# Altium PCB STM32_MICROCONTROLLER.PcbDoc
Units mm, origin at the board's own origin, x right, y up, seen from the top; angles counter-clockwise.
Board outline 34 x 34 mm, 4 copper layers (L1 (SIGNAL), L2 (GND), L3 (GND), L4 (SIGNAL)), stack 1.57 mm thick; 35 components, 26 nets, 172 pads, 47 vias.
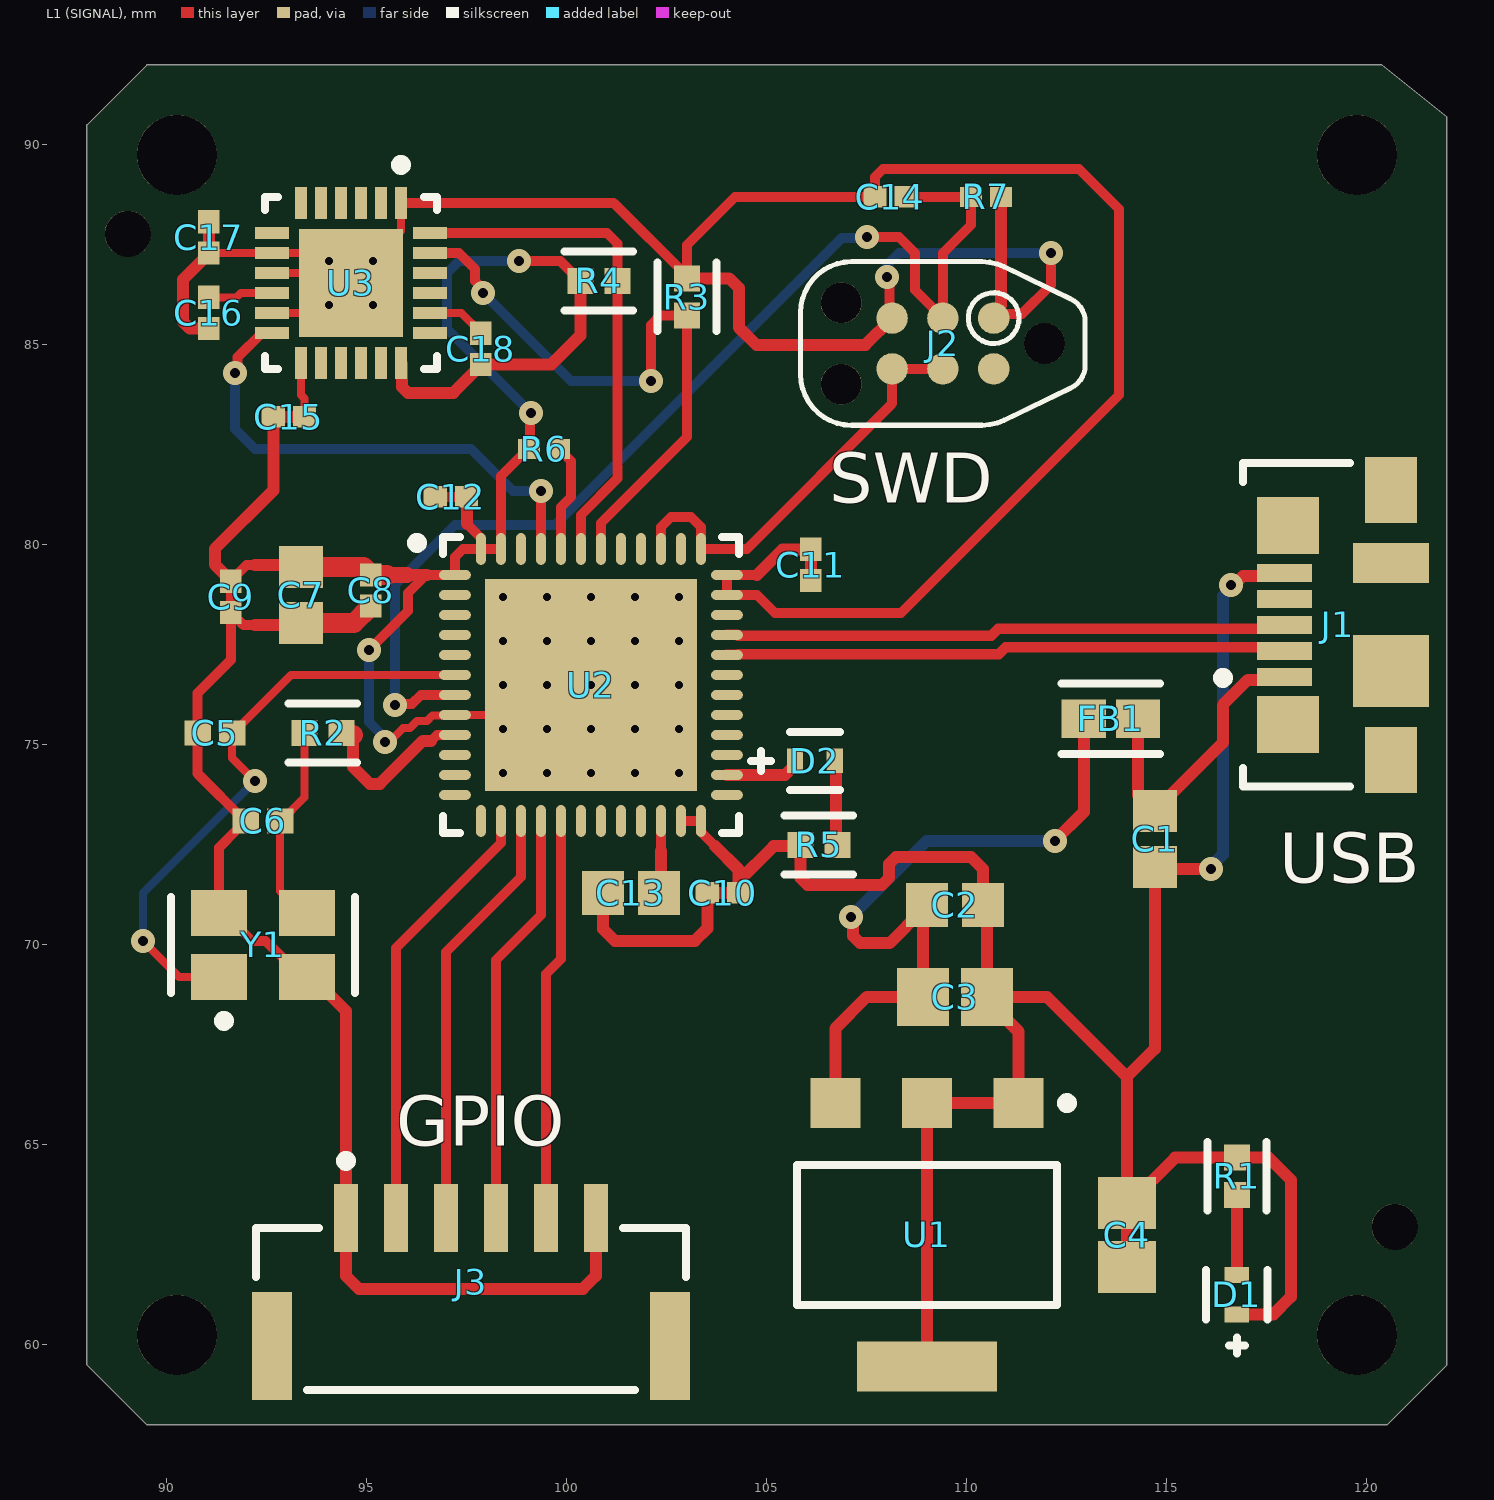
[diagram p0: L1 (SIGNAL) view]
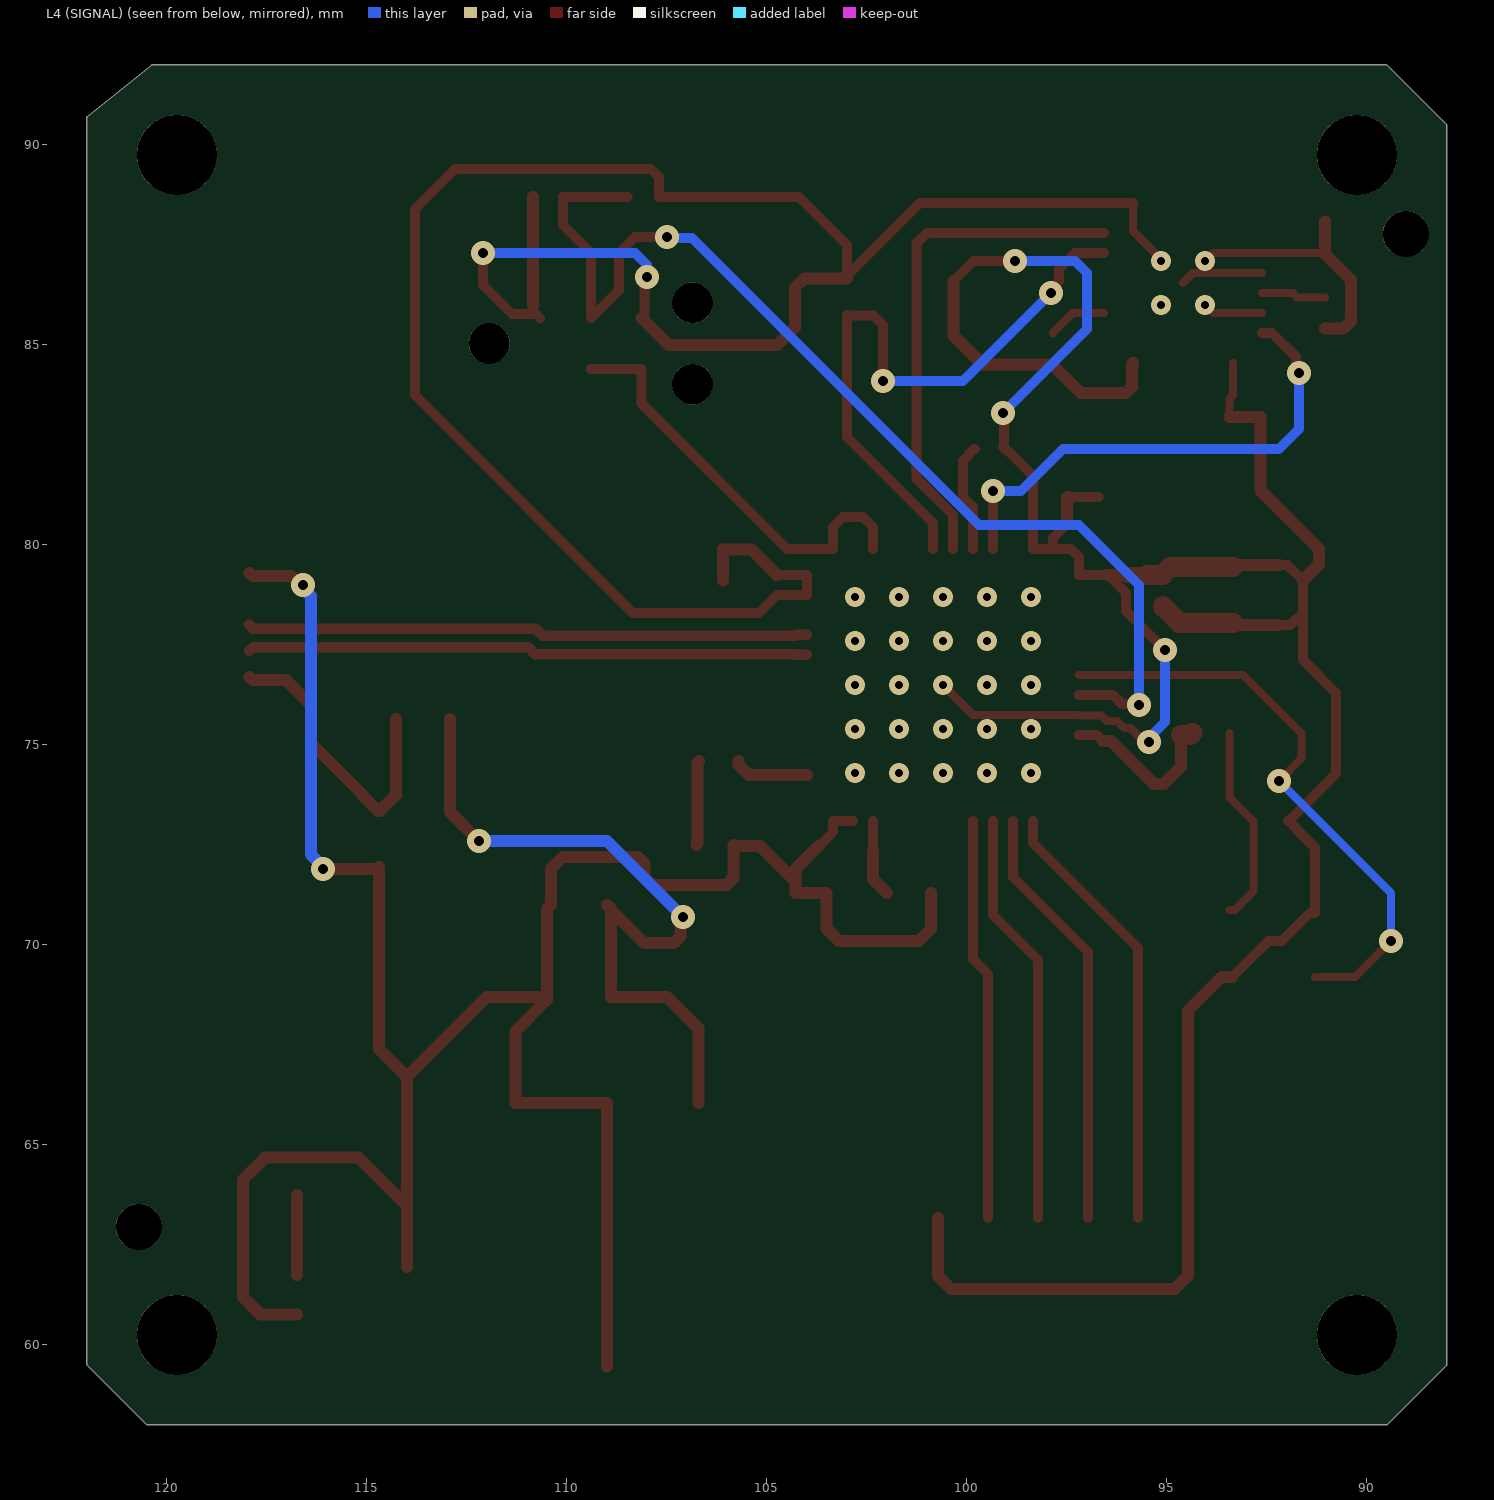
[diagram p1: L4 (SIGNAL) view, seen from below]
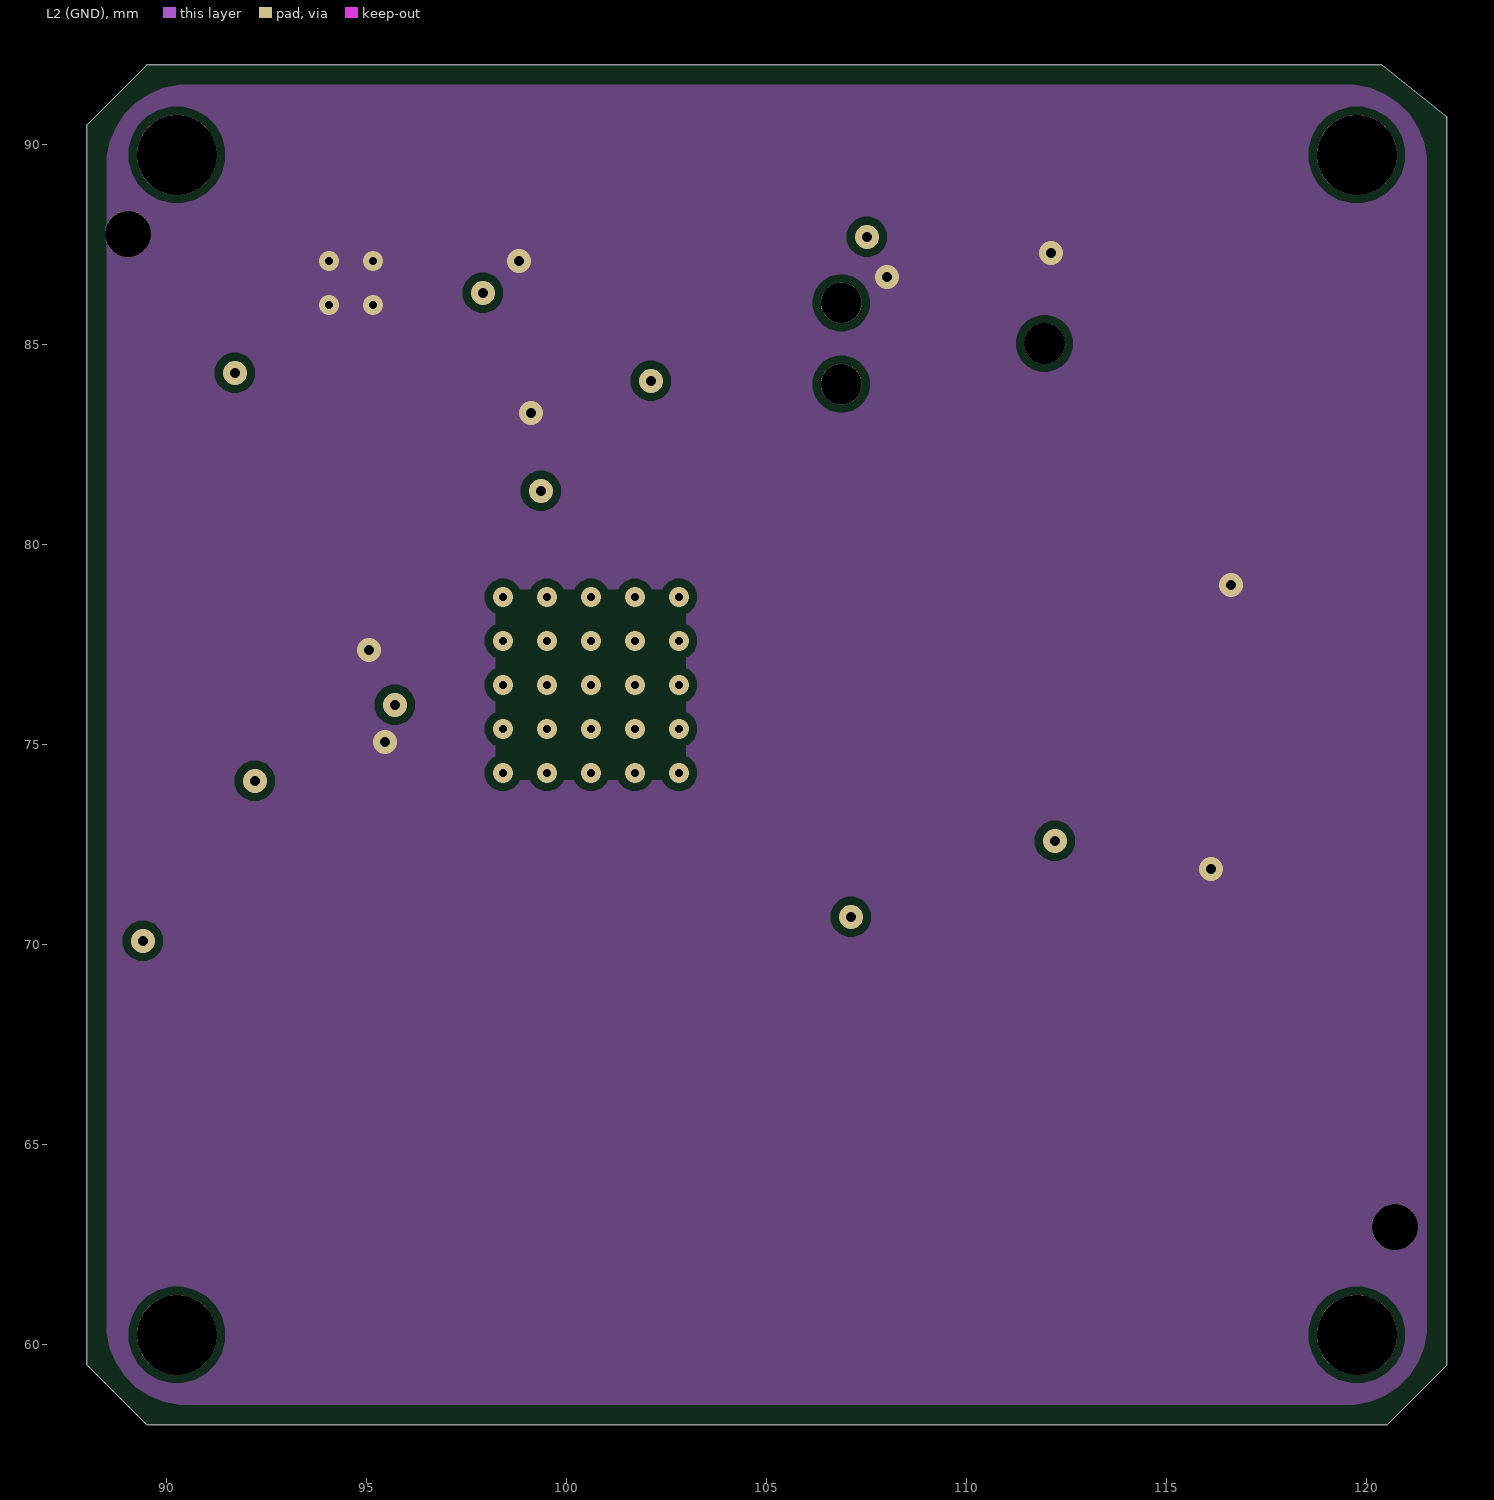
[diagram p2: L2 (GND)]
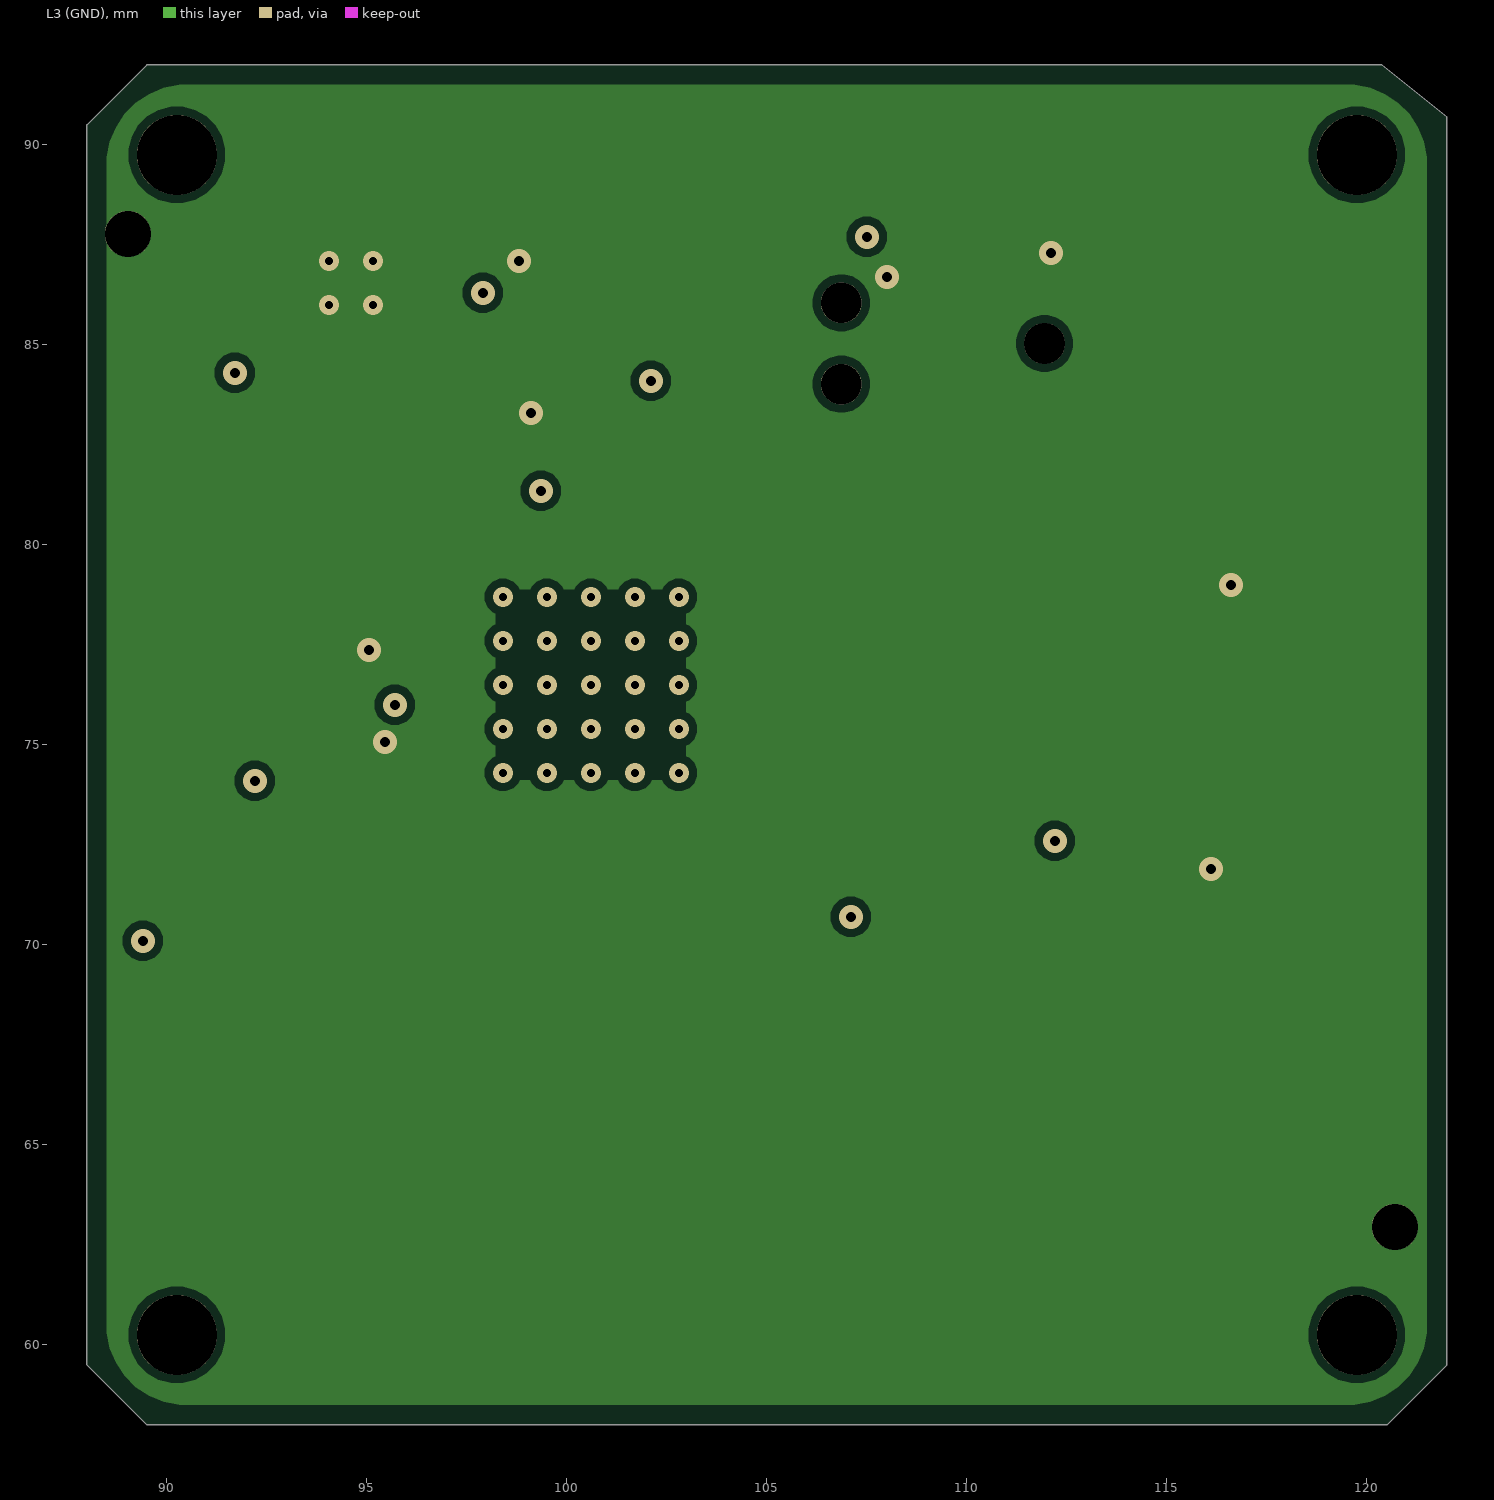
[diagram p3: L3 (GND)]

## Layer stack, top to bottom
Top Solder: solder mask 0.0254, SM-001, Dk 4
L1 (SIGNAL): signal copper 0.035
Dielectric 1: prepreg 0.2, PP-017, Dk 4.6
L2 (GND): signal copper 0.0175
Dielectric 3: core 1.065, Core-039, Dk 4.6
L3 (GND): signal copper 0.0175
Dielectric 5: prepreg 0.2, PP-017, Dk 4.6
L4 (SIGNAL): signal copper 0.035
Bottom Solder: solder mask 0.0254, SM-001, Dk 4

## Board outline
88,59.5 89.5,58 120.5,58 122,59.5 122,90.7 120.375,92 89.5,92 88,90.5

## Design rules (kind name [scope] priority, off if disabled: settings)
Clearance [All] p1: gap=0.2 ignorepadtopadclearanceinfootprint=FALSE
DiffPairsRouting [All] p1: maxlimit=0.254 minlimit=0.203 mostfreqgap=0.254 toplayer_maxgap=0.203 toplayer_prefgap=0.203 toplayer_minwidth=0.26 toplayer_maxwidth=0.26 toplayer_prefwidth=0.26 bottomlayer_maxgap=0.203 bottomlayer_prefgap=0.203 bottomlayer_minwidth=0.26 bottomlayer_maxwidth=0.26 bottomlayer_prefwidth=0.26 impedanceprofiledriven=TRUE impedanceprofileid={CE6202E7-2D1D-44E0-85A5-A17BC3FAF533} impedanceprofilevalue=90.000000 maxuncoupledlength=12.7
PolygonConnect [All] p1: connectstyle=Direct reliefconductorwidth=0.254 reliefentries=4 polygonreliefangle="90 Angle" airgapwidth=0.254
RoutingVias [All] p1: holewidth=0.3 width=0.7 viastyle="Through Hole" minholewidth=0.25 minwidth=0.55 maxholewidth=0.4 maxwidth=0.9
SolderMaskExpansion [All] p1: expansion=0 istentingtop=FALSE
SupplyNets "Schematic Supply Nets_1" [InNet('GND')] p1: voltage=0.000
SupplyNets "Schematic Supply Nets_3" [InNet('VBUS')] p2: voltage=0.000
SupplyNets "Schematic Supply Nets" [InNet('+5V')] p3: voltage=0.000
UnRoutedNet [All] p1: checkbadconnections=TRUE
Width [All] p1: maxlimit=1 minlimit=0.2 preferedwidth=0.3 midlayer1_minwidth=0.254 midlayer1_maxwidth=0.254 midlayer1_prefwidth=0.254 midlayer2_minwidth=0.254 midlayer2_maxwidth=0.254 midlayer2_prefwidth=0.254 minimp=50.000000 maximp=50.000000 favimp=50.000000
28 further rules are at their usual default settings.

## Classes and differential pairs
differential pair class DIFF_USB: USB_D
differential pair USB_D: +USB_D_P -USB_D_N

## Components (designator, comment, footprint, x,y, rotation, side; value= is the part's Value field where it differs from the comment)
C1 "2u2" CAPC1608X95X40ML15T15 114.7,72.65 r90 top
C2 "2u2" CAPC1608X95X40ML15T15 109.7,71 r180 top
C3 "22u" CAPC2013X140X50NL20T25 109.7,68.7 r180 top
C4 "22u" CAPC2013X140X50NL20T25 114,62.75 r270 top
C5 "10p" CAPC1005X60X30NL05T10 91.2,75.3 r0 top
C6 "10p" CAPC1005X60X30NL05T10 92.4,73.1 r0 top
C7 "2u2" CAPC1608X95X40ML15T15 93.35,78.75 r90 top
C8 "100n" CAPC1005X56X25LL10T15 95.1,78.86 r90 top
C9 "100n" CAPC1005X56X25LL10T15 91.6,78.7 r90 top
C10 "100n" CAPC1005X56X25LL10T15 103.9,71.3 r0 top
C11 "100n" CAPC1005X56X25LL10T15 106.1,79.5 r90 top
C12 "100n" CAPC1005X56X25LL10T15 97.1,81.2 r0 top
C13 "2u2" CAPC1608X95X40ML15T15 101.6,71.3 r0 top
C14 "100n" CAPC1005X56X25LL10T15 108.09,88.7 r0 top
C15 "100n" CAPC1005X56X25LL10T15 93.05,83.2 r0 top
C16 "100n" CAPC1005X56X25LL10T15 91.05,85.8 r90 top
C17 "10n" CAPC1005X56X25LL10T15 91.05,87.69 r90 top
C18 "2n2" CAPC1005X56X25LL10T15 97.85,84.9 r270 top
D1 "SM0402GC" FP-SM0402GC-MFG 116.75,61.255 r90 top
D2 "SM0402RC" FP-SM0402RC-MFG 106.2,74.6 r0 top
FB1 "120R" FP-BLM18-0_15-t0_8-IPC_B 113.6,75.65 r180 top
J1 "473460001" FP-473460001-MFG 120.25,78 r90 top
J2 "TC2030-CTX" TC2030-IDC-NL 109.4,85.035 r180 top
J3 "SM06B-GHS-TB(LF)(SN)" FP-SM06B-GHS-TB_LF_SN-MFG 97.6,60.9 r0 top
R1 "1k" FP-RMCF0402-IPC_A 116.75,64.216 r270 top
R2 "0R" FP-RMCF0402-IPC_A 93.9,75.3 r0 top
R3 "2k2" FP-RMCF0402-IPC_A 103,86.2 r90 top
R4 "2k2" FP-RMCF0402-IPC_A 100.8,86.6 r180 top
R5 "1k" FP-RMCF0402-IPC_A 106.3,72.5 r0 top
R6 "10k" RESC1005X40X25LL10T10 99.425,82.4 r0 top
R7 "10k" RESC1005X40X25LL10T10 110.475,88.7 r0 top
U1 "AMS1117-3.3" FP-AMS1117-IPC_C 109,62.75 r270 top
U2 "STM32F411CEU6" STM-UFQFPN48_L 100.6,76.5 r0 top
U3 "MPU-6050" IS-QFN-24_V 94.6,86.55 r270 top
Y1 "24MHz" FP-TSX-3225-MFG 92.4,70 r0 top

## Footprints (in the part's own frame and the unit in brackets; to place one, negate y for a bottom-side part, rotate by r counter-clockwise, add the part's x,y. Pads: shape width x height; smd on the part's side, far side on the other; paste and mask are expansions set on the pad)
CAPC1005X56X25LL10T15 [mm] "Chip Capacitor, 2-Leads, Body 1.00x0.50mm, IPC High Density"
  rect 0.58x0.54 smd: 1(-0.39,0) 2(0.39,0)
  body extent -0.55,-0.3 0.55,0.3, height 0.56
CAPC1005X60X30NL05T10 [mm] "Chip Capacitor, 2-Leads, Body 1.00x0.50mm, IPC Medium Density"
  rect 0.66x0.62 smd: 1(-0.43,0) 2(0.43,0)
  body extent -0.53,-0.28 0.53,0.27, height 0.6
CAPC1608X95X40ML15T15 [mm] "Chip Capacitor, 2-Leads, Body 1.60x0.80mm, IPC Low Density"
  rect 1.05x1.1 smd: 1(-0.7,0) 2(0.7,0)
  body extent -0.88,-0.48 0.87,0.47, height 0.95
CAPC2013X140X50NL20T25 [mm] "Chip Capacitor, 2-Leads, Body 2.00x1.25mm, IPC Medium Density"
  rect 1.3x1.45 smd: 1(-0.8,0) 2(0.8,0)
  body extent -1.1,-0.72 1.1,0.72, height 1.4
FP-473460001-MFG [mm]
  rect 0.45x1.38 smd paste+0 mask+0: 1(-1.3,2.31) 2(-0.65,2.31) 3(0,2.31) 4(0.65,2.31) 5(1.3,2.31)
  rect 1.425x1.55 smd paste+0 mask+0: 6(-2.488,2.225) 7(2.488,2.225)
  rect 1.65x1.3 smd paste+0 mask+0: 8(-3.375,-0.35) 11(3.375,-0.35)
  rect 1.8x1.9 smd paste+0 mask+0: 9(-1.15,-0.35)
  rect 1x1.9 smd paste+0 mask+0: 10(1.55,-0.35)
  silkscreen extent -4.05,0.67 4.05,3.97, body extent -4.3,-2.48 4.3,3.45, height 0.25
FP-AMS1117-IPC_C [mm]
  rect 1.25x1.25 smd paste+0 mask+0: 1(-3.295,2.29) 2(-3.295,0) 3(-3.295,-2.29)
  rect 1.25x3.5 smd paste+0 mask+0: 4(3.295,0)
  silkscreen extent -3.42,-3.25 1.75,3.63, body extent -3.9,-3.35 3.9,3.35, height 0.25
FP-BLM18-0_15-t0_8-IPC_B [mm]
  rect 1.106x0.958 smd paste+0 mask+0: 1(-0.676,0) 2(0.676,0)
  silkscreen extent -1.23,-0.88 1.23,0.88, body extent -1.48,-0.73 1.48,0.73, height 0.25
FP-RMCF0402-IPC_A [mm]
  rect 0.65x0.65 smd paste+0 mask+0: 1(-0.466,0) 2(0.466,0)
  silkscreen extent -0.86,-0.74 0.86,0.74, body extent -1.06,-0.54 1.06,0.54, height 0.25
FP-SM06B-GHS-TB_LF_SN-MFG [mm]
  rect 0.6x1.7 smd paste+0 mask+0: 1(-3.125,2.275) 2(-1.875,2.275) 3(-0.625,2.275) 4(0.625,2.275) 5(1.875,2.275) 6(3.125,2.275)
  rect 1x2.7 smd paste+0 mask+0: 7(-4.975,-0.925) 8(4.975,-0.925)
  silkscreen extent -5.38,-2.02 5.38,3.82, body extent -5.58,-2.37 5.58,3.22, height 0.25
FP-SM0402GC-MFG [mil]
  rect 16x24 smd paste+0 mask+0: 1(-19.5,0) 2(19.5,0)
  silkscreen extent -58,-30 25,31, body extent -31,-18 31,18, height 10
FP-SM0402RC-MFG [mil]
  rect 16x24 smd paste+0 mask+0: 1(-19.5,0) 2(19.5,0)
  silkscreen extent -63,-29 24,29, body extent -31,-18 31,18, height 10
FP-TSX-3225-MFG [mm]
  rect 1.4x1.15 smd paste+0 mask+0: 1(-1.1,-0.8) 2(1.1,-0.8) 3(1.1,0.8) 4(-1.1,0.8)
  silkscreen extent -2.3,-2.02 2.3,1.2, body extent -1.9,-1.48 1.9,1.48, height 0.25
IS-QFN-24_V [mm] "QFN, 24-Leads, Body 4x4mm, Pitch 0.5mm, Thermal Pad 2.7x2.6mm"
  rect 0.8x0.3 smd: 1(-2,1.25) 2(-2,0.75) 3(-2,0.25) 4(-2,-0.25) 5(-2,-0.75) 6(-2,-1.25) 13(2,-1.25) 14(2,-0.75) 15(2,-0.25) 16(2,0.25) 17(2,0.75) 18(2,1.25)
  rect 0.3x0.85 smd mask+0.102: 7(-1.25,-1.975) 8(-0.75,-1.975) 9(-0.25,-1.975) 10(0.25,-1.975) 11(0.75,-1.975) 12(1.25,-1.975) 19(1.25,1.975) 20(0.75,1.975) 21(0.25,1.975) 22(-0.25,1.975) 23(-0.75,1.975) 24(-1.25,1.975)
  rect 2.7x2.6 smd: 25(0,0)
  silkscreen extent -3.07,-2.15 2.15,2.15, body extent -2,-2 2,2, height 0.95
RESC1005X40X25LL10T10 [mm] "Chip Resistor, 2-Leads, Body 1.00x0.50mm, IPC High Density"
  rect 0.55x0.5 smd: 1(-0.375,0) 2(0.375,0)
  body extent -0.55,-0.3 0.55,0.3, height 0.4
STM-UFQFPN48_L [mm] "QFN, 48-Leads, Body 7.1x7.1mm, Pitch 0.5mm, Thermal Pad 5.6x5.6mm, IPC High Density"
  oval 0.8x0.25 smd: 1(-3.4,2.75) 2(-3.4,2.25) 3(-3.4,1.75) 4(-3.4,1.25) 5(-3.4,0.75) 6(-3.4,0.25) 7(-3.4,-0.25) 8(-3.4,-0.75) 9(-3.4,-1.25) 10(-3.4,-1.75) 11(-3.4,-2.25) 12(-3.4,-2.75) 25(3.4,-2.75) 26(3.4,-2.25) 27(3.4,-1.75) 28(3.4,-1.25) 29(3.4,-0.75) 30(3.4,-0.25) 31(3.4,0.25) 32(3.4,0.75) 33(3.4,1.25) 34(3.4,1.75) 35(3.4,2.25) 36(3.4,2.75)
  oval 0.25x0.8 smd: 13(-2.75,-3.4) 14(-2.25,-3.4) 15(-1.75,-3.4) 16(-1.25,-3.4) 17(-0.75,-3.4) 18(-0.25,-3.4) 19(0.25,-3.4) 20(0.75,-3.4) 21(1.25,-3.4) 22(1.75,-3.4) 23(2.25,-3.4) 24(2.75,-3.4) 37(2.75,3.4) 38(2.25,3.4) 39(1.75,3.4) 40(1.25,3.4) 41(0.75,3.4) 42(0.25,3.4) 43(-0.25,3.4) 44(-0.75,3.4) 45(-1.25,3.4) 46(-1.75,3.4) 47(-2.25,3.4) 48(-2.75,3.4)
  rect 5.3x5.3 smd: 49(0,0)
  silkscreen extent -4.47,-3.7 3.7,3.7, body extent -3.55,-3.55 3.55,3.55, height 0.6
TC2030-IDC-NL [mil]
  round 31 smd paste-39.37: 1(-50,-25) 2(-50,25) 3(0,-25) 4(0,25) 5(50,-25) 6(50,25)
  round 40 hole 40 unplated: ""(-100,0) ""(100,-40) ""(100,40)
  silkscreen extent -140,-80 140,81

## Part data
C1 C2 C7 C13: library part CMP-2006-01685-1, Manufacturer=Vitramon, Part Number=VJ0603A270JXJPW1BC
C3 C4: library part CMP-2007-03253-1, Manufacturer=Kemet, Part Number=C0805C185K4RACTU
C5 C6: library part CMP-2008-02128-1, Manufacturer=Kemet, Part Number=C0402C103K4RALTU
C8 C9 C10 C11 C12 C14 C15 C16 C17 C18: library part CMP-2008-02962-1, Manufacturer="AVX Interconnect / Elco", Part Number=0402YC392KAT2A
D1: library part CMP-35283-000001-2, "LED GREEN CLEAR 0402 SMD", Case Code (Imperial)=0402, Case Code (Metric)=1005, Color=Green, Forward Voltage=1.9V, Lens Color=Colorless, Test Current=20mA, Case/Package=0402, Dominant Wavelength=572nm, Height=0.71mm, Length=1mm, Lens Size=1mm, Lens Style=Flat, Lens Transparency=Clear, Luminous Intensity=28.5mcd, Mount="Surface Mount", Packaging="Tape and Reel", Viewing Angle=130°, Width=0.5mm
D2: library part CMP-35283-000003-1, "LED RED CLEAR 0402 SMD", Case Code (Imperial)=0402, Case Code (Metric)=1005, Color=Red, Forward Voltage=2.1V, Lens Color=Colorless, Test Current=20mA, Case/Package=0402, Dominant Wavelength=631nm, Height=0.71mm, Length=1mm, Lens Size=1mm, Lens Style=Flat, Lens Transparency=Clear, Luminous Intensity=90mcd, Mount="Surface Mount", Packaging="Tape and Reel", Viewing Angle=130°, Width=0.5mm
FB1: library part CMP-06046-002640-1, "Chip Ferrite Bead, 0603, 330Ω @ 100MHz, 0.58Ω, 25%, 400mA", RoHS Compliant=Yes
J1: library part CMP-2000-05246-2, "CONN RCPT USB2.0 MICRO B SMD R/A", Current Rating=1.8A, Manufacturer=Molex, Package=0, Temperature="-30°C to +85°C", Temperature Range High=+85°C, Temperature Range Low=-30°C, Voltage Rating=30V, Automotive=No, Category=Conn, ComponentLink2Description=Datasheet, ComponentLink2URL=https://www.molex.com/webdocs/datasheets/pdf/en-us/0473460001_IO_CONNECTORS.pdf, Conn Orientation="Right Angle", Contact Material=Gold,Nickel, Device Class L1=Connectors, Device Class L2="USB Connectors", Device Class L3=unset, Digikey Description="CONN RCPT USB2.0 MICRO B SMD R/A", Footprint Url=https://www.molex.com/pdm_docs/sd/473460001_sd.pdf, Height=2.945mm, Is Female=yes, Lead Free=Yes, Manufacturer Part Number=473460001, Number Of Contacts=5, Octopart=https://octopart.com/47346-0001-molex-7164928, Pitch=0.65mm, RoHS=TRUE, Shielding=true, Usb Standard="USB 2.0"
J2: "CortexÂ® Plug-Of-Nailsâ„¢ Adapter Cable", Package=None, Availability=Unavailable, MF="Tag-Connect LLC", MP=TC2030-CTX, Price=None, SnapEDA_Link=https://www.snapeda.com/parts/TC2030-CTX/Tag-Connect%20LLC/view-part/225831/?ref=snap
J3: library part CMP-17439-000061-1, "CONN HEADER SMD R/A 6POS 1.25MM", Color=Natural, Contact Resistance=50mR, Current Rating=1A, Housing Color=Beige, Max Operating Temperature=85°C, Max Voltage Rating (AC)=50V, Min Operating Temperature=-25°C, Connector Type="Outer Shroud Contact", Contact Material=Bronze, Contact Plating=Tin, Depth=4.05mm, Fastening Type=Ramp, Housing Material=Polyamide, Lead Free="Lead Free", Length=10.75mm, Max Current Rating=1A, Mount="Surface Mount", Number Of Contacts=6, Number of Positions=6, Number of Rows=1, Orientation="Right Angle", Packaging="Tape and Reel", Pitch=1.25mm, Termination=Solder, Voltage Rating=50V
R1 R3 R4 R5: library part CMP-26527-000517-1, "5.1MΩ ±5% 0.063W 0402 Thick Film Chip Resistor AEC-Q200 compliant", Case Code (Imperial)=0402, Case Code (Metric)=1005, Max Operating Temperature=155°C, Max Power Dissipation=63mW, Min Operating Temperature=-55°C, Resistance=5.1MR, Resistor Type="Thick Film", Temperature Coefficient=200ppm/°C, Tolerance=5%, Case/Package=0402, Contact Plating=Tin, Features="Automotive AEC-Q200", Height=0.016inch, Length=0.039inch, Mount="Surface Mount", Number of Terminations=2, Packaging="Tape and Reel", Radiation Hardening=No, RoHS Compliant=Yes, Series=RMCF, Width=0.02inch
R2: library part CMP-26527-005447-1, "2.7MΩ ±5% 0.063W 0402 Thick Film Chip Resistor AEC-Q200 compliant", Case Code (Imperial)=0402, Case Code (Metric)=1005, Max Operating Temperature=155°C, Max Power Dissipation=63mW, Min Operating Temperature=-55°C, Package Quantity=1, Resistance=2.7MR, Resistor Type="Thick Film", Temperature Coefficient=200ppm/°C, Tolerance=5%, Case/Package=0402, Contact Plating=Tin, Features="Automotive AEC-Q200", Height=0.016inch, Length=0.039inch, Mount="Surface Mount", Number of Terminations=2, Packaging="Cut Tape", RoHS Compliant=Yes, Series=RMCF, Width=0.02inch
R6 R7: library part CMP-2002-04584-1, Manufacturer="KOA Speer", Part Number=SG73P1ETTP1002F
U1: library part CMP-209535-000001-1, "LDO Voltage Regulators 1A, 3.3V", Dropout Voltage=1.1V, Manufacturer="Advanced Monolithic Systems", Max Junction Temp=+125°C, Max Power Dissipation=1.2W, Max Supply Voltage=15V, Nominal Supply Current=5mA, Output Current=1A, Output Voltage=3.3V, Package=AMS1117, Temperature="-40°C to +125°C", Temperature Range Low=-40°C, Automotive=No, Category=IC, ComponentLink2Description=Datasheet, ComponentLink2URL=http://www.advanced-monolithic.com/pdf/ds1117.pdf, Device Class L1="Integrated Circuits (ICs)", Device Class L2="Power Management ICs", Device Class L3="Voltage Regulators - Linear", Height=1.8mm, Ipc Land Pattern Name=SOT229P700X180-4, Lead Free=Yes, Manufacturer Part Number=AMS1117-3.3, Number Of Outputs=1, Octopart=https://octopart.com/ams1117-3.3-advanced+monolithic+systems-25899300, Output Type=Fixed, RoHS=TRUE, Standoff Height=0.64mm, Temperature Range High=+125°C
U2: library part CMP-0243-00165-1, "ARM Cortex-M4 32-bit MCU+FPU, 512 KB Flash, 128 KB RAM, 36 I/Os, 48-Pin UFQFPN, -40 to 85 degC, Tray", I/Os (High Current)=36, Operating Frequency(F) (Processor speed) (MHz)=100, Package Description=UFQFPN48, Package Reference="48-Pin Ultra Thin Fine Pitch Quad Flat No-Lead, 7 x 7 x 0.6 mm Body, 0.5 mm Pitch, Exposed Pad", Supply Voltage(Vcc) min (V)=1.7, ComponentLink1Description="Manufacturer URL", ComponentLink1URL=http://www.st.com/, ComponentLink2Description=Datasheet, ComponentLink2URL=http://www.st.com/st-web-ui/static/active/en/resource/technical/document/datasheet/DM00115249.pdf, Core="ARM Cortex-M4", DatasheetVersion="Rev. 6", FLASH Size (Prog) (kB)=512, Internal RAM Size (kB)=128, Mounting Technology="Surface Mount", Packing=Tray
U3: library part CMP-1753-00002-2, "3-Axis Gyroscope, Accelerometer and a Digital Motion Processor(TM) (DMP), 2.375 to 3.46 V, -40 to 85 degC, 24-Pin QFN, RoHS, Tape and Reel", Manufacturer=InvenSense, Standard Package=5,000, Category=Sensors,Transducers, Datasheet URL=http://datasheet.octopart.com/MPU-6050-InvenSense-datasheet-14421344.pdf, Datasheet Version="Rev. 3.3, 05/2012", Dynamic Catalog=MPU-6000™Series, Family=Multifunction, Featured Product=MPU-60506-Axis,IntegratedI²CSolution, Manufacturer URL=http://www.invensense.com/, Online Catalog=MPU-6000™Series, Other Names="1428-1007-2 / MPU6050", Output Type=Digital, Sensor Type=MotionTracking, Unit PriceUSD=Digital
Y1: library part CMP-36405-000018-1, "CRYSTAL 24.0000MHZ 9PF SMD", Case/Package=SMD/SMT, ESR (Equivalent Series Resistance)=40R, Frequency Stability=20ppm, Frequency Tolerance=10ppm, Load Capacitance=9pF, Max Operating Temperature=105°C, Min Operating Temperature=-40°C, Package Quantity=250, Depth=2.5mm, Drive Level=200uW, Frequency=24MHz, Height=0.024inch, Lead Free="Lead Free", Length=3.2mm, Mount="Surface Mount", Number of Pins=4, Packaging="Tape and Reel", RoHS Compliant=Yes, Series=TSX-3225, Termination=SMD/SMT, Tolerance=10ppm, Weight=0.000564oz, Width=2.5mm

## Free pads (board coordinates)
  round 2 hole 2: MH(90.25,60.25) MH(90.25,89.75) MH(119.75,60.25) MH(119.75,89.75)
  round 1.152 hole 1.152: TH(89.025,87.775) TH(120.7,62.95)

## Via types
v1: diameter 0.5, hole 0.2, L1 (SIGNAL) to L4 (SIGNAL), 29 vias
v2: diameter 0.6, hole 0.25, L1 (SIGNAL) to L4 (SIGNAL), 18 vias

## Nets (pads, with @x,y where several pads share a name; then routed paths per layer and width w, separated by ;. In a path a pad name is that pad's centre, name@x,y a point inside that pad or via, vN(x,y) a via of type N, cw(c..) or ccw(c..) an arc to the next point about the centre after c; other vN are vias at no path point)
+5V: C2.2 C3.2 FB1.2 U1.3 | length 18.6
  L1 (SIGNAL) w0.3: U1.3 106.71,67.91 107.5,68.7 C3.2 108.9,70.9 C2.2 ; v2(107.1,70.7) 107.157,70.643 107.157,70.218 107.333,70.043 108.068,70.043 C2.2@108.9,70.875 ; v2(112.2,72.6) 112.924,73.324 FB1.2
  L4 (SIGNAL) w0.3: v2(107.1,70.7) 109,72.6 v2(112.2,72.6)
GND: C1.1 C2.1 C3.1 C4.1 C4.2 C5.1 C6.1 C7.1 C7.2 C8.1 C8.2 C9.1 C9.2 C10.1 C10.2 C11.1 C11.2 C12.1 C12.2 C13.1 C14.1 C15.1 C15.2 C16.1 C17.1 C17.2 C18.2 D1.1 J1.5 J2.1 J2.5 J3.1 J3.6 pad.TH R1.1 R3.2 R4.2 R5.1 R6.1 R7.2 U1.1 U1.2 U1.4 U2.1 U2.8 U2.23 U2.24 U2.35 U2.36 U2.47 U2.48 U2.49 U3.1 U3.8 U3.9 U3.11 U3.13 U3.18 U3.25 Y1.2 Y1.4 | length 217.4
  L1 (SIGNAL) w0.2: C17.1 U3.8 93.85,87.3 v1(94.05,87.1) ; U3.11 93.85,85.8 v1(94.05,86) ; U3.9 94.35,86.8 U3.25 ; U3.13 93.35,83.75 93.44,83.66 C15.2 ; U3.25@95.15,87.15 95.85,87.85 U3.1 ; v2(95.45,75.075) 95.558,75.075 95.908,75.425 96.075,75.425 96.25,75.6 96.5,75.6 96.64,75.74 97.19,75.74 U2.8 99.85,75.75 U2.49 ; J2.1@110.85,85.85 R7.2
  L1 (SIGNAL) w0.25: C9.1@91.6,78.29 91.745,78.145 91.765,78.145 91.91,78 92.2,78 ; C9.2 C9.1 91.6,77.127 90.77,76.297 C5.1 90.77,74.28 C6.1@91.95,73.1 ; C9.2@91.6,79.11 91.99,79.5 92.2,79.5 ; C6.1 C6.1@91.95,73.1 ; Y1.2@93.375,69.2 92.675,69.9 92.665,69.9 92.465,70.1 92.125,70.1 91.425,70.8 Y1.4 91.3,72.43 91.765,72.895 91.765,72.915 C6.1@91.95,73.1 ; v2(95.05,77.375) 96.025,78.35 96.025,78.8 96.475,79.25 U2.1 97.2,79.7 97.4,79.9 U2.48 ; U3.1 101.17,88.55 103,86.72 103,87.5 104.2,88.7 C14.1 107.7,89.2 107.9,89.4 112.8,89.4 113.8,88.4 113.8,83.746 108.354,78.3 105.2,78.3 104.75,78.75 U2.35 U2.36 U2.36@104.275,79.25 ; C12.1 C12.2 ; 97.5,80.525 97.85,80.175 U2.48 ; v2(98.8,87.1) 99.834,87.1 R4.2 ; v2(99.1,83.3) 99.075,83.275 99.075,82.475 99.1,82.45 R6.1 99.025,82.4 98.35,81.725 U2.47 U2.48 ; U2.23 U2.24 103.35,72.825 103.7,72.475 ; U2.36@104.276,79.251 104.756,79.251 ; v2(108,86.7) 108.065,86.635 108.065,85.735 J2.5 ; J2.1 110.773,85.773 111.373,85.773 112.1,86.5 v2(112.1,87.3)
  L1 (SIGNAL) w0.3: C16.1 90.576,85.41 90.4,85.586 90.4,86.63 91.05,87.28 C17.1 C17.2 ; C9.2@91.6,79.11 91.2,79.51 91.2,79.9 92.66,81.36 C15.1 C15.2 ; 92.2,78 93.3,78 C7.1 ; 92.2,79.5 93.3,79.5 C7.2 ; Y1.2@93.375,69.2 93.625,69.2 94.475,68.35 J3.1 94.475,61.725 94.8,61.4 100.4,61.4 100.725,61.725 J3.6 ; U3.18 95.875,84.525 95.875,83.951 96.026,83.8 97.16,83.8 97.85,84.49 C18.2 99.61,84.51 100.334,85.234 R4.2 ; 96,79.25 96.5,79.25 ; C12.2 97.5,81.19 97.5,80.525 ; C13.1 100.9,70.4 101.2,70.1 103.2,70.1 103.51,70.41 C10.1 C10.2 104.29,71.59 ; R3.2 104.059,86.666 104.3,86.424 104.3,85.435 104.735,85 107.46,85 J2.5 ; 103.7,72.475 104.29,71.885 104.29,71.59 ; 104.756,79.251 105.395,79.89 C11.2 C11.1 ; U1.4 U1.2 U1.1 111.29,67.835 C3.1@110.5,68.625 ; J2.1@110.85,85.982 R7.2 ; C4.2 C4.1 ; v2(116.1,71.9) 114.75,71.9 C1.1 114.7,67.4 114,66.7 ; v2(116.6,79) 116.681,79 116.906,79.225 117.865,79.225 J1.5 ; D1.1 117.659,60.759 118.1,61.2 118.1,64.124 117.543,64.681 R1.1 115.206,64.681 114.075,63.55 C4.1 ; 104.29,71.59 105.17,72.47 105.804,72.47 R5.1 105.834,71.676 106.01,71.5 107.882,71.5 108.058,71.676 108.058,72.024 108.234,72.2 110.1,72.2 110.4,71.9 C2.1 110.5,70.9 C3.1 112,68.7 114,66.7 ; C4.1 114,66.7
  L1 (SIGNAL) w0.4: 95.5,79.25 96,79.25
  L1 (SIGNAL) w0.5: C7.1 94.68,78.05 95.06,78.43 95.08,78.43 95.1,78.45 C8.1 ; C7.2 94.92,79.45 95.1,79.27 C8.2 95.5,79.25
  L4 (SIGNAL) w0.25: v2(95.05,77.375) 95.05,75.57 95.45,75.17 v2(95.45,75.075) ; v2(98.8,87.1) 97.3,87.1 97,86.8 97,85.4 v2(99.1,83.3) ; v2(108,86.7) 108,87 108.3,87.3 v2(112.1,87.3)
  L4 (SIGNAL) w0.3: v2(116.1,71.9) 116.1,71.961 116.4,72.261 116.4,78.719 116.6,78.919 v2(116.6,79)
  other v1: 95.15,86 95.15,87.1
IMU_CPOUT: C18.1 U3.20 | length 1.5
  L1 (SIGNAL) w0.2: U3.20 97.36,85.8 97.85,85.31 C18.1
IMU_INT: U2.45 U3.12 | length 12.7
  L1 (SIGNAL) w0.25: v2(91.7,84.3) 91.767,84.367 91.767,84.692 92.375,85.3 U3.12 ; U2.45 v2(99.35,81.35)
  L4 (SIGNAL) w0.25: v2(91.7,84.3) 91.7,82.9 92.2,82.4 97.6,82.4 98.65,81.35 v2(99.35,81.35)
IMU_REGOUT: C16.2 U3.10 | length 1.6
  L1 (SIGNAL) w0.2: C16.2 91.743,86.19 91.852,86.3 U3.10
IMU_SCL: R3.1 U2.42 U3.23 | length 16.2
  L1 (SIGNAL) w0.25: U3.23 97.3,87.3 97.7,86.9 97.7,86.595 97.9,86.395 v2(97.9,86.3) ; U2.42 100.85,80.55 103,82.7 R3.1@103,85.75 ; v2(102.1,84.1) 102.1,85.5 102.334,85.734 R3.1
  L4 (SIGNAL) w0.25: v2(97.9,86.3) 100.1,84.1 v2(102.1,84.1)
IMU_SDA: R4.1 U2.43 U3.24 | length 12.8
  L1 (SIGNAL) w0.25: U3.24 101,87.8 101.266,87.534 R4.1 101.266,81.666 100.35,80.75 U2.43
LED_PWR_K: D1.2 R1.2 | length 2
  L1 (SIGNAL) w0.3: D1.2 R1.2
MCU_BOOT0: R6.2 U2.44 | length 2.7
  L1 (SIGNAL) w0.25: R6.2 99.825,82.4 99.95,82.275 99.95,82.25 100.1,82.1 100.1,81.2 99.85,80.95 U2.44
MCU_DIO: U2.34
MCU_LED_A: D2.1 U2.26 | length 1.9
  L1 (SIGNAL) w0.3: U2.26 105.456,74.25 105.705,74.498 D2.1
MCU_LED_K: D2.2 R5.2 | length 2.1
  L1 (SIGNAL) w0.3: D2.2 106.73,74.565 106.73,72.535 R5.2
MCU_NRST: C14.2 J2.3 R7.1 U2.7 | length 28.2
  L1 (SIGNAL) w0.25: v2(95.7,76) 95.727,76.027 96.127,76.027 96.35,76.25 U2.7 ; v2(107.5,87.7) 108.3,87.7 108.7,87.3 108.7,86.37 J2.3 109.4,87.3 110.1,88 R7.1 C14.2
  L4 (SIGNAL) w0.25: v2(95.7,76) 95.7,79 97.2,80.5 99.7,80.5 106.873,87.673 107.473,87.673 v2(107.5,87.7)
MCU_OSC_IN: C5.2 U2.6 Y1.1 | length 15
  L1 (SIGNAL) w0.2: v2(89.4,70.1) 90.3,69.2 Y1.1 ; C5.2 91.63,74.67 v2(92.2,74.1) ; C5.2@91.65,75.3 93.1,76.75 U2.6
  L4 (SIGNAL) w0.2: v2(89.4,70.1) 89.4,71.3 v2(92.2,74.1)
MCU_OSC_OUT: R2.2 U2.9 | length 4.3
  L1 (SIGNAL) w0.25: 96.6,75.1 96.75,75.25 U2.9
  L1 (SIGNAL) w0.3: R2.2@94.65,75.25 94.65,74.45 95.076,74.024 95.324,74.024 96.4,75.1 96.6,75.1
  L1 (SIGNAL) w0.5: R2.2 94.416,75.25 R2.2@94.65,75.25
MCU_PA4: J3.2 U2.14 | length 11
  L1 (SIGNAL) w0.25: J3.2 95.725,69.925 98.35,72.55 U2.14
MCU_PA5: J3.3 U2.15 | length 10.7
  L1 (SIGNAL) w0.25: J3.3 96.975,69.825 98.85,71.7 U2.15
MCU_PA6: J3.4 U2.16 | length 10.4
  L1 (SIGNAL) w0.25: J3.4 98.225,69.625 99.35,70.75 U2.16
MCU_PA7: J3.5 U2.17 | length 10.1
  L1 (SIGNAL) w0.25: J3.5 99.475,69.275 99.85,69.65 U2.17
MCU_SWCLK: J2.4 J2.6 U2.37 U2.39 | length 10.7
  L1 (SIGNAL) w0.25: U2.39 102.35,80.45 102.6,80.7 103.1,80.7 103.35,80.45 U2.37 104.5,79.9 108.13,83.53 J2.6 J2.4
MCU_SWDIO: J2.2
MCU_VCAP1: C13.2 U2.22 | length 1.9
  L1 (SIGNAL) w0.25: 102.35,72.35 U2.22
  L1 (SIGNAL) w0.3: C13.2@102,71.3 102.35,71.65 102.35,72.35
USB_D_N: J1.2 U2.32 | length 14.1
  L1 (SIGNAL) w0.26: U2.32 104.265,77.25 104.283,77.268 110.796,77.268 110.971,77.443 117.847,77.443 J1.2
USB_D_P: J1.3 U2.33 | length 14.1
  L1 (SIGNAL) w0.26: U2.33 104.265,77.75 104.283,77.732 110.604,77.732 110.779,77.907 117.847,77.907 J1.3
VBUS: C1.2 FB1.1 J1.1 | length 7.7
  L1 (SIGNAL) w0.3: FB1.1 114.276,73.749 114.675,73.35 C1.2 114.725,73.35 115.1,73.725 115.1,73.75 116.4,75.05 116.4,76 117.025,76.625 117.865,76.625 J1.1
XTAL_IN: C6.2 R2.1 Y1.3 | length 5
  L1 (SIGNAL) w0.2: C6.2 92.83,71.345 93.305,70.87 Y1.3@93.43,70.87 ; C6.2@92.85,73.1 93.434,73.684 R2.1
pads on no net: J1.4 J1.6 J1.7 J1.8 J1.9 J1.10 J1.11 J2. J3.7 J3.8 U2.2 U2.3 U2.4 U2.5 U2.10 U2.11 U2.12 U2.13 U2.18 U2.19 U2.20 U2.21 U2.25 U2.27 U2.28 U2.29 U2.30 U2.31 U2.38 U2.40 U2.41 U2.46 U3.2 U3.3 U3.4 U3.5 U3.6 U3.7 U3.14 U3.15 U3.16 U3.17 U3.19 U3.21 U3.22
copper on no net:
  other v1: 98.4,74.3 99.5,74.3 100.6,74.3 101.7,74.3 102.8,74.3 98.4,75.4 99.5,75.4 100.6,75.4 101.7,75.4 102.8,75.4 98.4,76.5 99.5,76.5 100.6,76.5 101.7,76.5 102.8,76.5 98.4,77.6 99.5,77.6 100.6,77.6 101.7,77.6 102.8,77.6 98.4,78.7 99.5,78.7 100.6,78.7 101.7,78.7 102.8,78.7

## Polygon pours and split planes (outlines as drawn)
GND on L2 (GND) "GND_L02_P000" (solid, pour order 0): 88.5,89.5 cw(c90.5,89.5) 90.5,91.5 119.5,91.5 cw(c119.5,89.5) 121.5,89.5 121.5,60.5 cw(c119.5,60.5) 119.5,58.5 90.5,58.5 cw(c90.5,60.5) 88.5,60.5
GND on L3 (GND) "GND_L03_P001" (solid, pour order 1): 88.5,89.5 cw(c90.5,89.5) 90.5,91.5 119.5,91.5 cw(c119.5,89.5) 121.5,89.5 121.5,60.5 cw(c119.5,60.5) 119.5,58.5 90.5,58.5 cw(c90.5,60.5) 88.5,60.5

## Silkscreen, mask and mechanical layers (free items; w line width, h text height)
Top Overlay:
  text "SWD" at 106.559,81.05 h1.25
  text "USB" at 117.809,71.55 h1.25
  text "GPIO" at 95.738,64.975 h1.25
Mechanical 1:
  the board outline again, w0.254